# EAGLE board store-row-block (EAGLE 7.3.0)
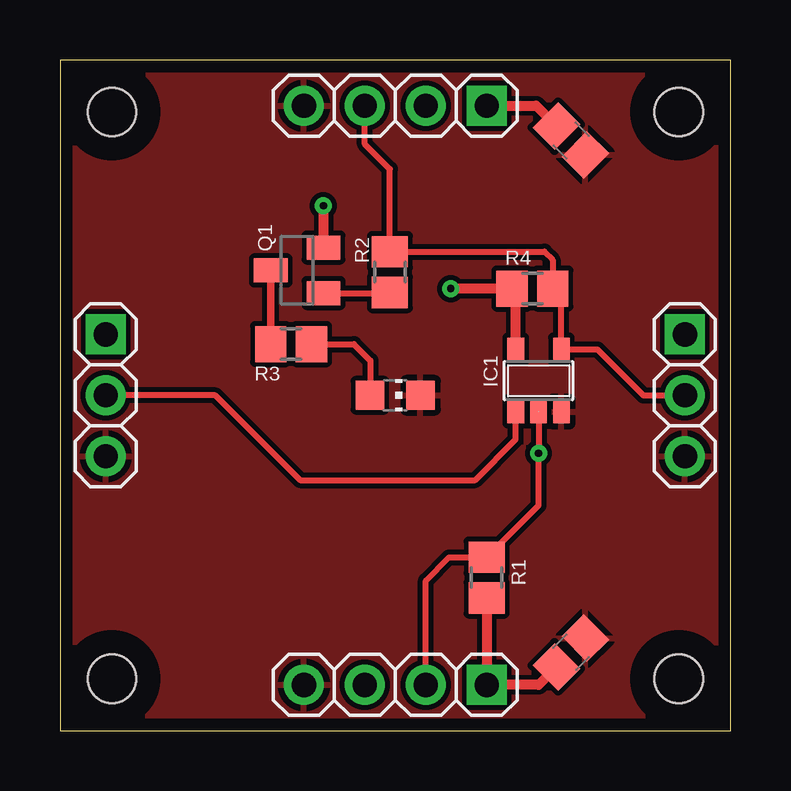
[diagram p0: board, top side]
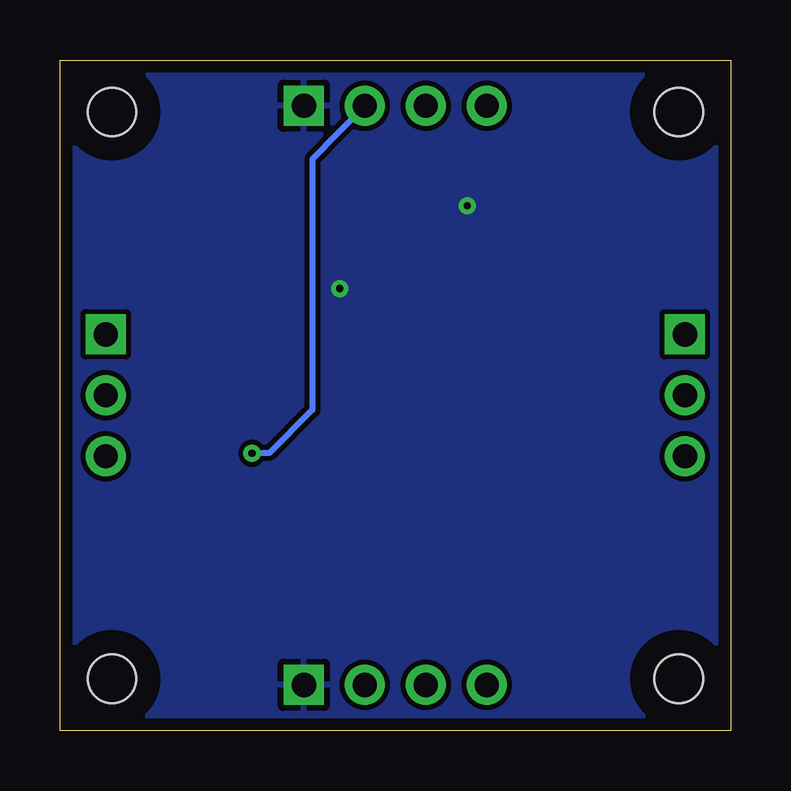
[diagram p1: board, bottom side, seen from below]

Size 27.94 x 27.94 mm. Coordinates in mm from the lower left corner, seen from the top.
Outline: 27.94,27.94 0,27.94 0,0 27.94,0 27.94,27.94
Copper layers (1*16): Top 0.035mm / dielectric 1.5mm / Bottom 0.035mm
Design rules "default *": minimum track width 8mil, minimum drill 12mil, track to track 8mil, track to pad 8mil, pad to pad 8mil, via to via 8mil, smd to smd 8mil, copper to edge 20mil, drill to drill 8mil, minimum pad ring 10mil, minimum via ring 8mil, stop-mask expansion 4mil, vias tented up to drill 0mil, thermal gap 10mil
Holes 2.01 mm at 2.16,2.16 25.78,2.16 25.78,25.78 2.16,25.78
tRestrict: area 23.8,0.2 to 27.8,4.2; area 23.8,23.8 to 27.8,27.8; area 0.2,23.8 to 4.2,27.8; area 0.2,0.2 to 4.2,4.2
bRestrict: area 23.8,0.2 to 27.8,4.2; area 23.8,23.8 to 27.8,27.8; area 0.2,23.8 to 4.2,27.8; area 0.2,0.2 to 4.2,4.2

## Footprints (pad centres in the part's own frame; a part is rotated, then mirrored left to right if it is on the bottom)
C0805 = smd 1.3 x 1.5: 1 -0.85,0; 2 0.85,0
SOT23-5 = smd 0.69 x 0.99: 1 -0.95,-1.29; 2 0,-1.29; 3 0.95,-1.29; 4 0.95,1.3; 5 -0.95,1.3
1X03 = drill 1.016 pad 1.676 square: 1 -2.54,0 | drill 1.016 pad 1.676: 2 0,0; 3 2.54,0
1X04 = drill 1.016 pad 1.676 square: 1 -3.81,0 | drill 1.016 pad 1.676: 2 -1.27,0; 3 1.27,0; 4 3.81,0
CHIP-LED0805 = smd 1.2 x 1.2: A 0,-1.05; C 0,1.05
SOT23-BEC = smd 1 x 1.4: B -0.95,-1.1; C 0,1.1; E 0.95,-1.1
R0805 = smd 1.3 x 1.5: 1 -0.85,0; 2 0.85,0

## Placement (x,y rotation side)
C1  [C0805]  21.29,3.25 45 top
C4  [C0805]  21.29,24.59 315 top
IC1  74LVC1G125DBV  [SOT23-5]  19.94,14.58 0 top
JP1  [1X03]  1.91,13.97 270 top
JP2  [1X04]  13.97,26.04 180 top
JP3  [1X03]  26.04,13.97 270 top
JP4  [1X04]  13.97,1.91 180 top
LED1  [CHIP-LED0805]  13.97,13.97 270 top
Q1  MMBT2907ALT1SMD  [SOT23-BEC]  9.88,19.18 90 top
R1  [R0805]  17.78,6.38 270 top
R2  [R0805]  13.74,19.1 90 top
R3  [R0805]  9.63,16.1 0 top
R4  [R0805]  19.68,18.41 180 top

## Library data of the parts
C1 C4 R1-R4 = resistor
IC1 = 74xx-little-us
JP1-JP4 = pinhead
LED1 = led
Q1 = transistor-pnp

## Nets
ENABLE: IC1.1 JP1.2
GND: C1.2 C4.2 IC1.3 JP1.3 JP2.4 JP3.3 JP4.4 LED1.C
N$2: Q1.B R2.1
N$4: Q1.C R3.1
N$5: LED1.A R3.2
ROW_EN: IC1.4 JP2.3 JP3.2 R2.2 R4.1
SND_RCV: IC1.2 JP2.2 JP4.2 R1.1
VCC: C1.1 C4.1 IC1.5 JP2.1 JP4.1 Q1.E R1.2 R4.2

## Tracks (layer width: path | path; a pad name or v marks a point on that pad's centre or on a via)
ENABLE
  Top 0.254: IC1.1 18.99,12.13 17.3,10.44 10.01,10.44 6.48,13.97 JP1.2
GND
  pour Top: 27.69,0.25 0.25,0.25 0.25,27.69 27.69,27.69
N$2
  Top 0.254: Q1.B 13.72,18.23 R2.1
N$4
  Top 0.305: R3.1 Q1.C
N$5
  Top 0.254: R3.2 12.24,16.1 12.93,15.42 LED1.A
ROW_EN
  Top 0.254: JP3.2 24.31,13.97 22.4,15.88 IC1.4 20.89,18.06 R4.1 20.52,18.43 20.52,19.61 20.18,19.95 R2.2 13.74,23.39 12.7,24.43 JP2.3
  Top 0.406: 20.87,18.08 R4.1
SND_RCV  (via drill 0.3)
  Top 0.254: IC1.2 v19.94,11.56 19.94,9.38 R1.1 17.79,7.21 16.2,7.21 15.24,6.25 JP4.2
  Bottom 0.254: JP2.2 17.42,23.8 17.42,13.36 19.23,11.56 v19.94,11.56
VCC  (via drill 0.3)
  Top 0.406: IC1.5 18.99,18.26 R4.2 v16.28,18.41 | JP2.1 19.84,26.04 C4.1 | Q1.E v10.98,21.86 v10.97,21.87 | R1.2 JP4.1 19.94,1.91 C1.1
  pour Bottom: 27.69,0.25 0.25,0.25 0.25,27.69 27.69,27.69

## Text on the board
Document: ROW SEL